# EAGLE board Simple Op Mic-Preamp single (EAGLE 6.2)
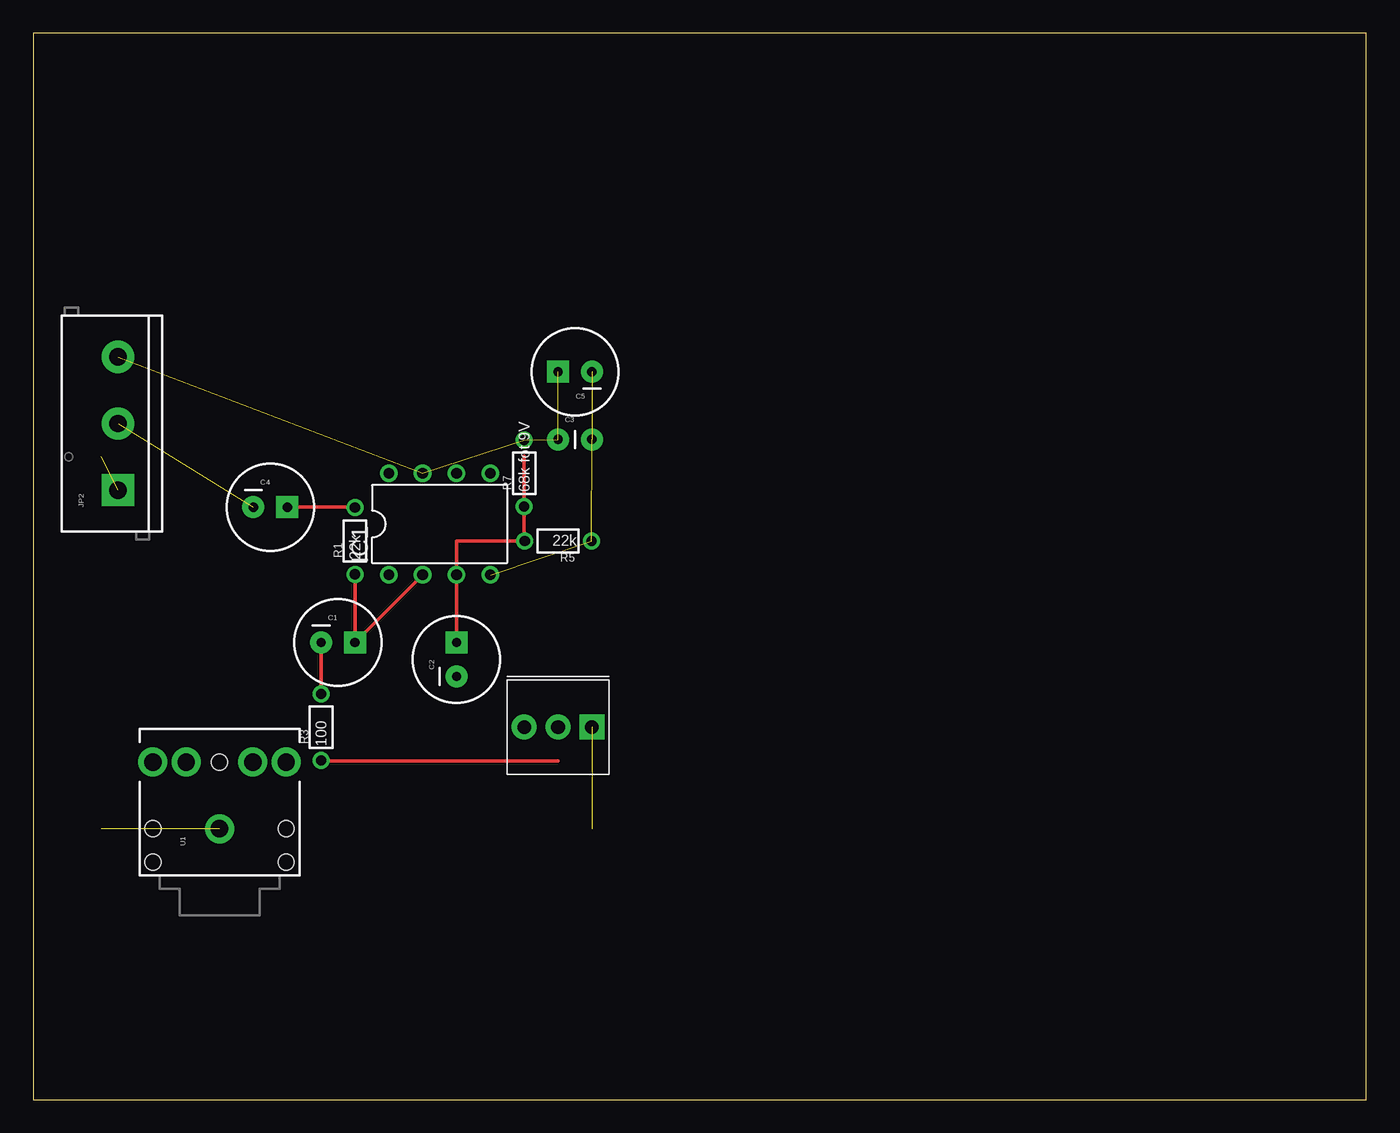
[diagram p0: board, top side]
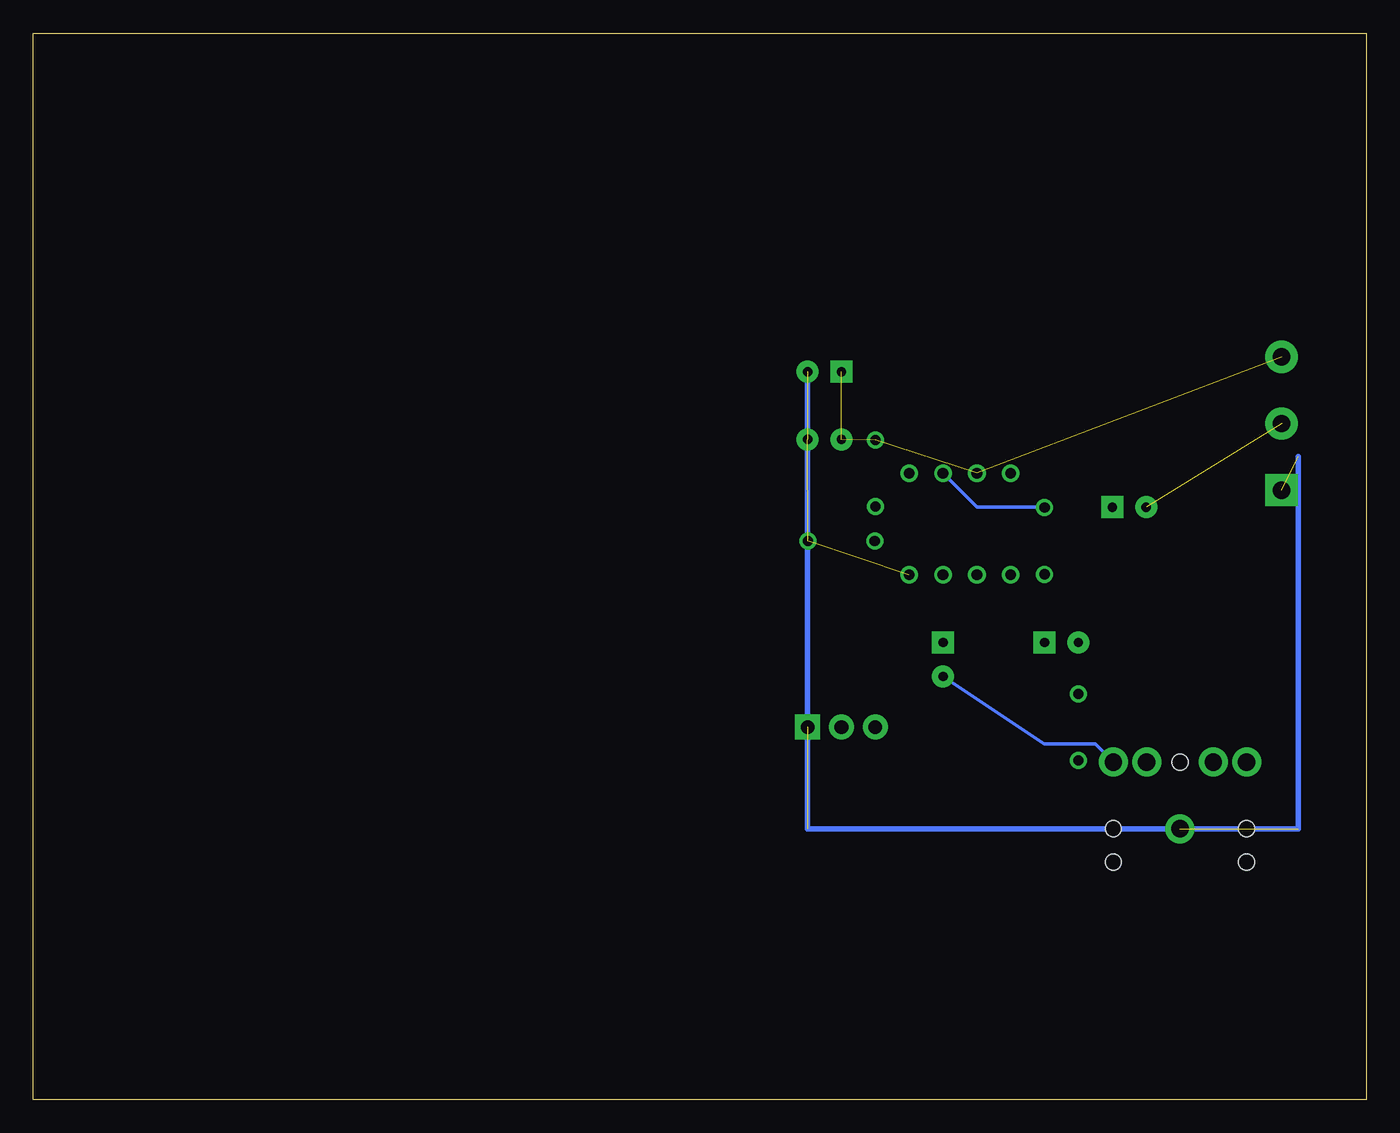
[diagram p1: board, bottom side, seen from below]

Size 100 x 80 mm. Coordinates in mm from the lower left corner, seen from the top.
Outline: 0,0 100,0 100,80 0,80 0,0
Copper layers (1*16): Top 0.035mm / dielectric 1.5mm / Bottom 0.035mm
Design rules: minimum track width 10mil, minimum drill 24mil, track to track 8mil, track to pad 8mil, pad to pad 8mil, via to via 8mil, smd to smd 8mil, copper to edge 40mil, drill to drill 8mil, minimum pad ring 10mil, minimum via ring 8mil, stop-mask expansion 4mil, vias tented up to drill 0mil, thermal gap 10mil

## Footprints (pad centres in the part's own frame; a part is rotated, then mirrored left to right if it is on the bottom)
CPOL-RADIAL-100UF-25V = drill 0.7 pad 1.651 square: 1 1.27,0 | drill 0.7 pad 1.651: 2 -1.27,0
CAP-PTH-SMALL = drill 0.7 pad 1.651: 1 0,0; 2 2.54,0
DIL08 = drill 0.813 pad 1.27: 1 -3.81,-3.81; 2 -1.27,-3.81; 3 1.27,-3.81; 4 3.81,-3.81; 5 3.81,3.81; 6 1.27,3.81; 7 -1.27,3.81; 8 -3.81,3.81
SCREWTERMINAL-5MM-3 = drill 1.3 pad 2.413 square: 1 0,0 | drill 1.3 pad 2.413: 2 5,0; 3 10,0
1/6W-RES = drill 0.762: 1 -2.5,0; 2 2.5,0
3362U = drill 1.016 pad 1.88 square: P$1 0,2.54 | drill 1.016 pad 1.88: P$2 2.54,2.54; P$3 5.08,2.54
AUDIO-JACK = drill 1.3 pad 2.184: RING 5,5; RSH 5,2.5; SLEEVE 0,0; TIP 5,-5; TSH 5,-2.5 | hole 1.2: 0,5; -2.5,5; -2.5,-5; 0,-5; 5,0

## Placement (x,y rotation side)
C1  10u  [CPOL-RADIAL-100UF-25V]  22.86,34.29 0 top
C2  10u  [CPOL-RADIAL-100UF-25V]  31.75,33.02 90 top
C3  0.1uF  [CAP-PTH-SMALL]  39.37,49.53 0 top
C4  10u  [CPOL-RADIAL-100UF-25V]  17.78,44.45 0 top
C5  100u  [CPOL-RADIAL-100UF-25V]  40.64,54.61 180 top
IC1  LF356N  [DIL08]  30.48,43.18 0 top
JP2  [SCREWTERMINAL-5MM-3]  6.35,45.72 90 top
R1  22k  [1/6W-RES]  24.13,41.91 90 top
R3  100  [1/6W-RES]  21.59,27.94 90 top
R5  22k  [1/6W-RES]  39.37,41.91 180 top
R7  68k fot 9V  [1/6W-RES]  36.83,46.99 90 top
TRIMPOT  20k  [3362U]  41.91,30.48 180 top
U1  [AUDIO-JACK]  13.97,20.32 90 top

## Library data of the parts
C1-C5 JP2 R3 R5 R7 U1 = SparkFun
IC1 R1 TRIMPOT = My Library

## Nets
GND: C3.2 C5.2 IC1.4 JP2.1 R5.1 TRIMPOT.P$1 U1.SLEEVE
N$2: C1.2 R3.2
N$3: C4.1 IC1.6 R1.2
N$4: R3.1 TRIMPOT.P$2 TRIMPOT.P$3
N$5: C1.1 IC1.2 R1.1
N$6: C2.1 IC1.3 R5.2 R7.1
N$8: C2.2 U1.TIP
N$9: U1.RING
N$13: C4.2 JP2.2
VCC: C3.1 C5.1 IC1.7 JP2.3 R7.2

## Tracks (layer width: path | path; a pad name or v marks a point on that pad's centre or on a via)
GND  (6 unrouted)
  Bottom 0.406: C5.2 41.91,20.32 5.08,20.32 5.08,48.26
N$2
  Top 0.254: C1.2 21.59,30.48 R3.2
N$3
  Top 0.254: C4.1 24.13,44.45 R1.2
  Bottom 0.254: IC1.6 29.21,44.45 24.13,44.45 R1.2
N$4
  Top 0.254: R3.1 21.59,25.4 36.83,25.4 39.37,25.4
N$5
  Top 0.254: R1.1 24.13,39.37 C1.1 IC1.2
N$6
  Top 0.254: 36.83,41.91 36.83,44.45 36.83,48.3 | 36.83,41.91 36.83,44.41 | C2.1 IC1.3 31.75,41.91 36.83,41.91 | 36.83,41.91 36.83,44.41 | 36.83,41.91 36.83,44.41
N$8
  Bottom 0.254: C2.2 24.13,26.67 20.32,26.67 19.05,25.4 U1.TIP
N$13  (1 unrouted)
VCC  (4 unrouted)